# EAGLE board v001 (EAGLE 6.4)
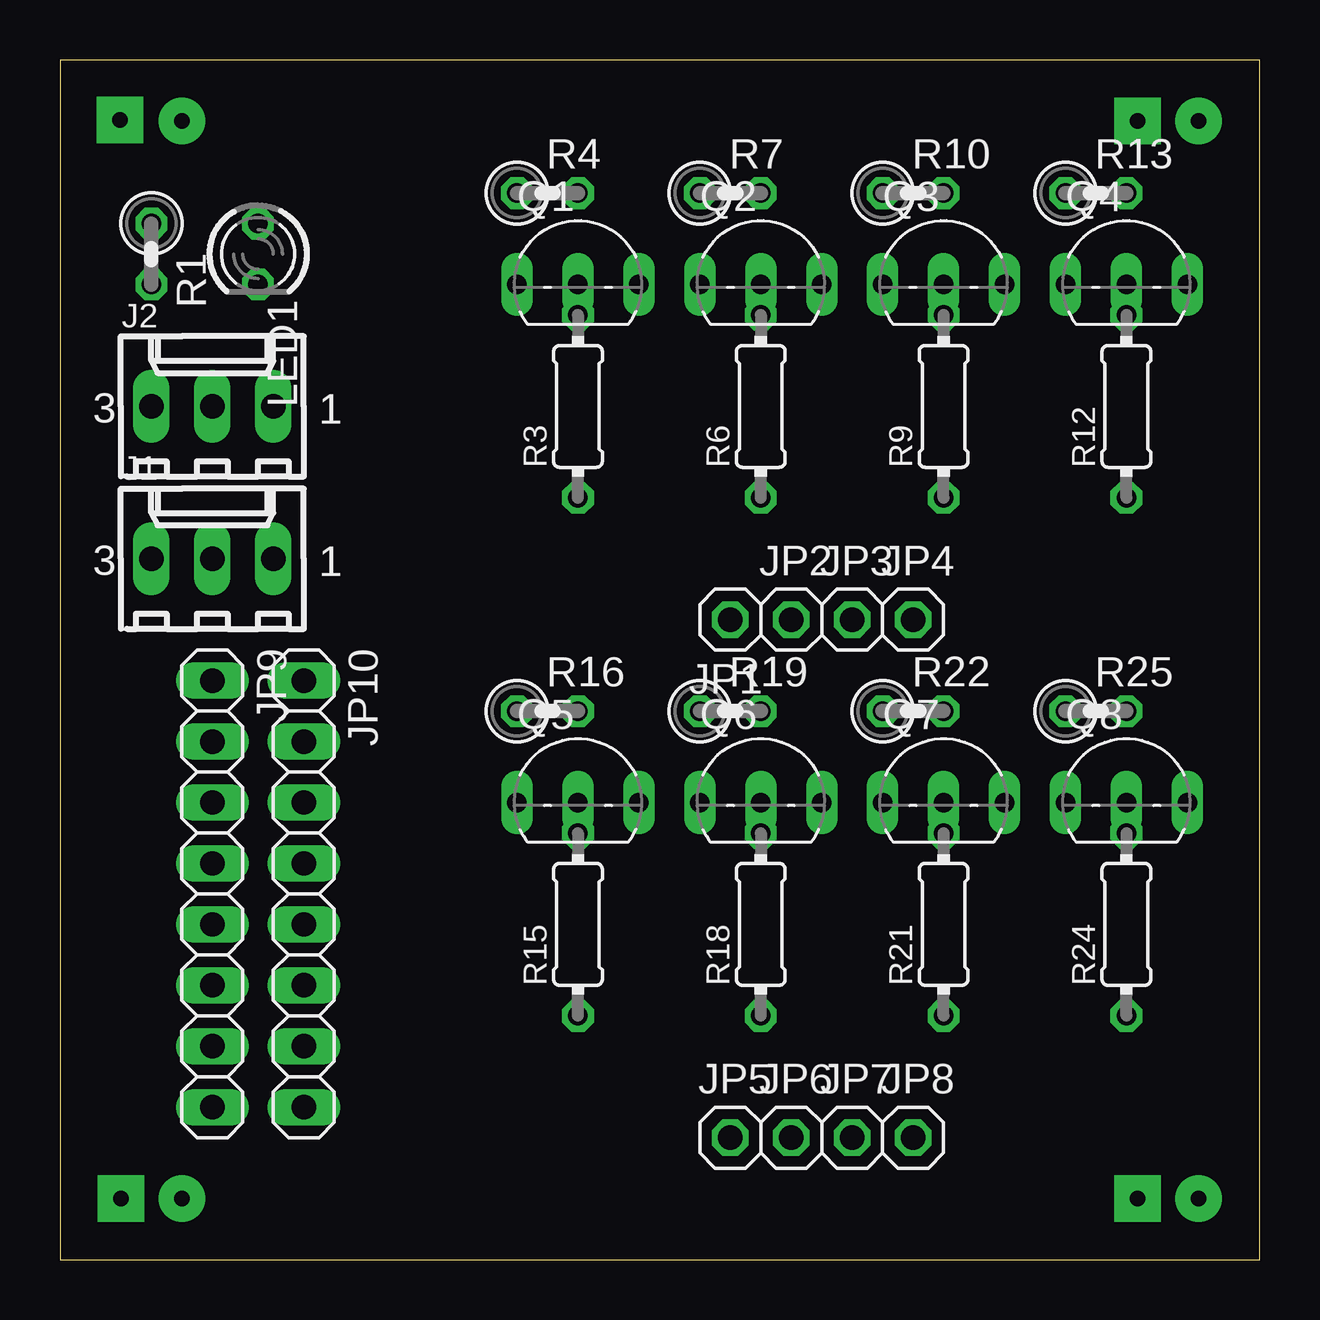
[diagram p0: board, top side]
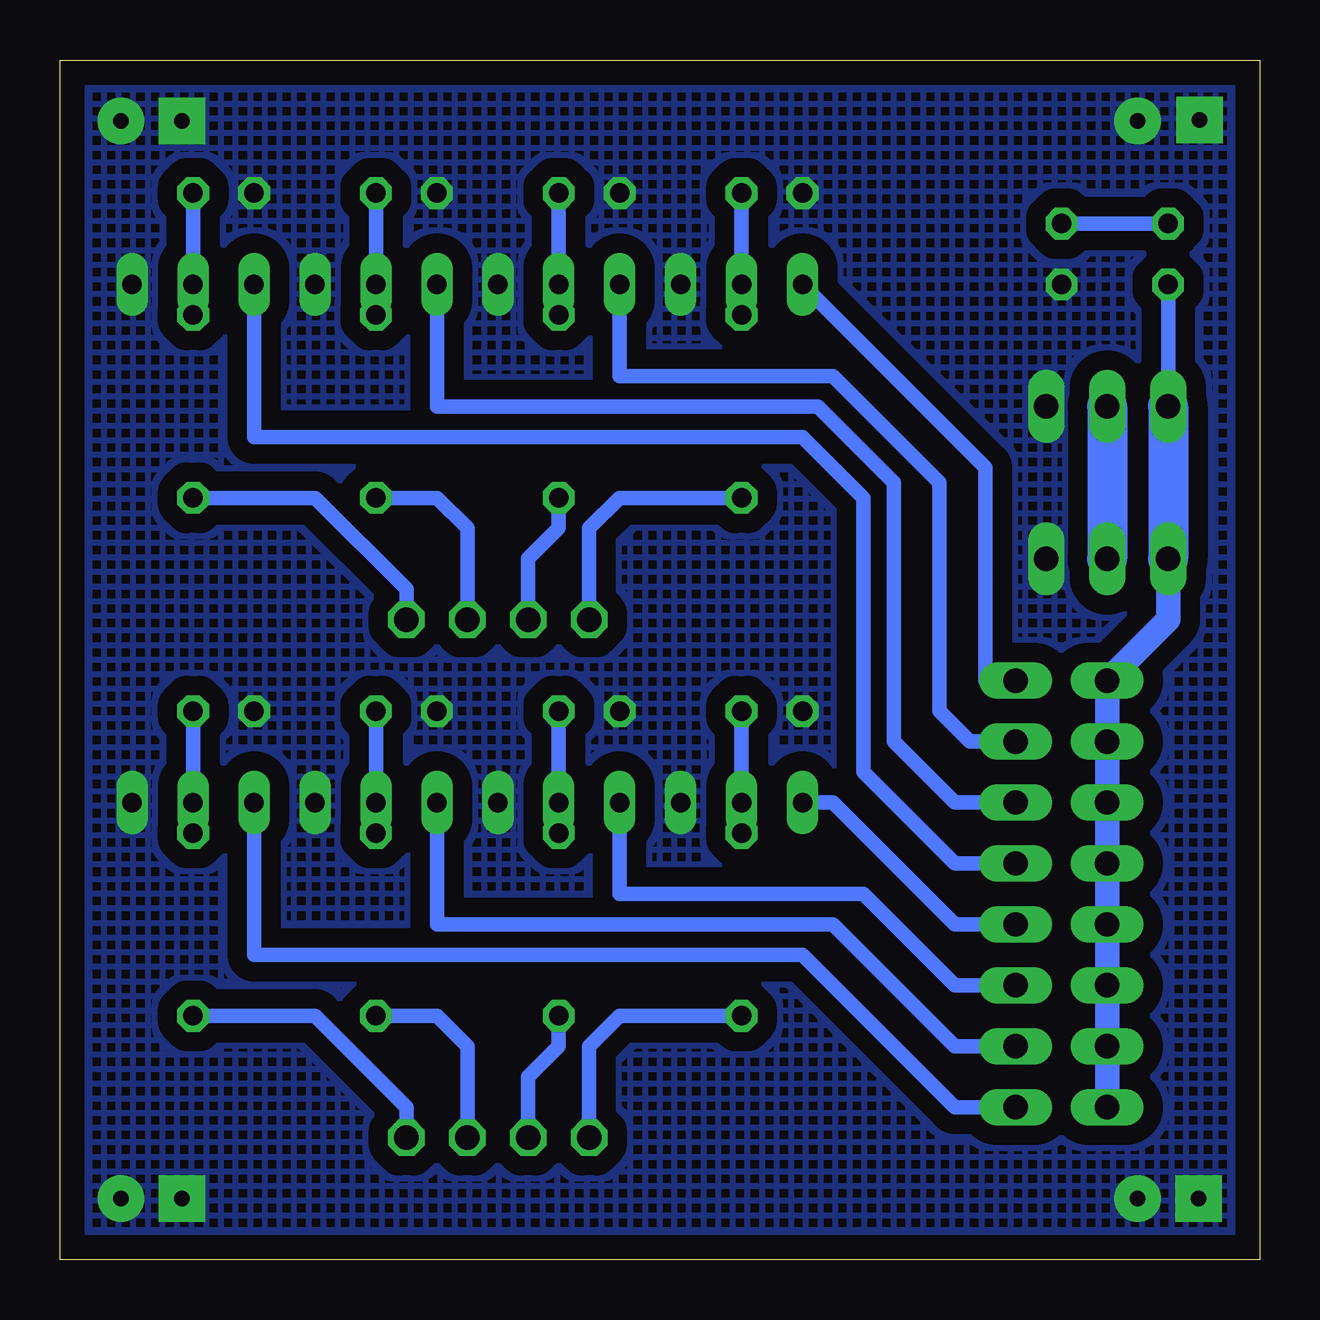
[diagram p1: board, bottom side, seen from below]

Size 50 x 50 mm. Coordinates in mm from the lower left corner, seen from the top.
Outline: 0,0 50,0 50,50 0,50 0,0
Copper layers (1*16): Top 0.035mm / dielectric 1.5mm / Bottom 0.035mm
Design rules "default": minimum track width 10mil, minimum drill 24mil, track to track 8mil, track to pad 8mil, pad to pad 8mil, via to via 8mil, smd to smd 8mil, copper to edge 40mil, drill to drill 8mil, minimum pad ring 10mil, minimum via ring 8mil, stop-mask expansion 4mil, vias tented up to drill 0mil, thermal gap 10mil

## Footprints (pad centres in the part's own frame; a part is rotated, then mirrored left to right if it is on the bottom)
6410-03 = drill 1.016 long: 1 2.54,0; 2 0,0; 3 -2.54,0
1X01 = drill 1.016 octagon: 1 0,0
1X08 = drill 1.016 long: 1 -8.89,0; 2 -6.35,0; 3 -3.81,0; 4 -1.27,0; 5 1.27,0; 6 3.81,0; 7 6.35,0; 8 8.89,0
LED3MM = drill 0.813 octagon: A -1.27,0; K 1.27,0
ZZZ_MODULE_05X05 = drill 0.64 pad 1.93 square: GND@1 2.5,47.5; GND@2 44.92,47.46; GND@7 2.54,2.54; GND@8 44.92,2.54 | drill 0.64 pad 1.93: GND@3 47.46,47.46; GND@4 5.08,47.46; GND@5 47.46,2.54; GND@6 5.08,2.54
TO92-EBC = drill 0.813 long: B 0,-1.27; C -2.54,-1.27; E 2.54,-1.27
0207/2V = drill 0.813 octagon: 1 -1.27,0; 2 1.27,0
0204/7 = drill 0.813 octagon: 1 -3.81,0; 2 3.81,0

## Placement (x,y rotation side)
J1  Pwr-1  [6410-03]  6.35,29.21 0 top
J2  Pwr-2  [6410-03]  6.35,35.56 0 top
JP1  In-1  [1X01]  27.94,26.67 180 top
JP2  In-2  [1X01]  30.48,26.67 0 top
JP3  In-3  [1X01]  33.02,26.67 0 top
JP4  In-4  [1X01]  35.56,26.67 0 top
JP5  In-5  [1X01]  27.94,5.08 0 top
JP6  In-6  [1X01]  30.48,5.08 0 top
JP7  In-7  [1X01]  33.02,5.08 0 top
JP8  In-8  [1X01]  35.56,5.08 0 top
JP9  12V  [1X08]  6.35,15.24 270 top
JP10  Outputs  [1X08]  10.16,15.24 270 top
LED1  Green  [LED3MM]  8.26,41.91 270 top
PCB1  ZZZ_MODULE05X05  [ZZZ_MODULE_05X05]  0,0 0 top
Q1  BC548  [TO92-EBC]  21.59,41.91 0 top
Q2  BC548  [TO92-EBC]  29.21,41.91 0 top
Q3  BC548  [TO92-EBC]  36.83,41.91 0 top
Q4  BC548  [TO92-EBC]  44.45,41.91 0 top
Q5  BC548  [TO92-EBC]  21.59,20.32 0 top
Q6  BC548  [TO92-EBC]  29.21,20.32 0 top
Q7  BC548  [TO92-EBC]  36.83,20.32 0 top
Q8  BC548  [TO92-EBC]  44.45,20.32 0 top
R1  1K  [0207/2V]  3.81,41.91 270 top
R3  2K2  [0204/7]  21.59,35.56 90 top
R4  10K  [0207/2V]  20.32,44.45 0 top
R6  2K2  [0204/7]  29.21,35.56 90 top
R7  10K  [0207/2V]  27.94,44.45 0 top
R9  2K2  [0204/7]  36.83,35.56 90 top
R10  10K  [0207/2V]  35.56,44.45 0 top
R12  2K2  [0204/7]  44.45,35.56 90 top
R13  10K  [0207/2V]  43.18,44.45 0 top
R15  2K2  [0204/7]  21.59,13.97 90 top
R16  10K  [0207/2V]  20.32,22.86 0 top
R18  2K2  [0204/7]  29.21,13.97 90 top
R19  10K  [0207/2V]  27.94,22.86 0 top
R21  2K2  [0204/7]  36.83,13.97 90 top
R22  10K  [0207/2V]  35.56,22.86 0 top
R24  2K2  [0204/7]  44.45,13.97 90 top
R25  10K  [0207/2V]  43.18,22.86 0 top

## Library data of the parts
J1 J2 = con-molex; OC_FARNELL: unknown; OC_NEWARK: unknown
JP1-JP10 = pinhead
LED1 = led
PCB1 = GNLib
Q1-Q8 = transistor-npn
R1 R4 R7 R10 R13 R16 R19 R22 R25 = resistor
R3 R6 R9 R12 R15 R18 R21 R24 = rcl

## Nets
+5V: J1.2 J2.2
+12V: J1.3 J2.3 JP9.1 JP9.2 JP9.3 JP9.4 JP9.5 JP9.6 JP9.7 JP9.8 R1.2
GND: J1.1 J2.1 LED1.K PCB1.GND@1 PCB1.GND@2 PCB1.GND@3 PCB1.GND@4 PCB1.GND@5 PCB1.GND@6 PCB1.GND@7 PCB1.GND@8 Q1.E Q2.E Q3.E Q4.E Q5.E Q6.E Q7.E Q8.E R4.1 R7.1 R10.1 R13.1 R16.1 R19.1 R22.1 R25.1
N$1: LED1.A R1.1
N$2: Q2.B R6.2 R7.2
N$3: JP2.1 R6.1
N$5: Q3.B R9.2 R10.2
N$6: JP3.1 R9.1
N$8: Q4.B R12.2 R13.2
N$9: JP4.1 R12.1
N$11: Q5.B R15.2 R16.2
N$12: JP5.1 R15.1
N$14: Q1.B R3.2 R4.2
N$15: JP1.1 R3.1
N$16: Q6.B R18.2 R19.2
N$17: JP6.1 R18.1
N$19: Q7.B R21.2 R22.2
N$20: JP7.1 R21.1
N$22: Q8.B R24.2 R25.2
N$23: JP8.1 R24.1
OUTPUT-1: JP10.1 Q1.C
OUTPUT-2: JP10.2 Q2.C
OUTPUT-3: JP10.3 Q3.C
OUTPUT-4: JP10.4 Q4.C
OUTPUT-5: JP10.5 Q5.C
OUTPUT-6: JP10.6 Q6.C
OUTPUT-7: JP10.7 Q7.C
OUTPUT-8: JP10.8 Q8.C

## Tracks (layer width: path | path; a pad name or v marks a point on that pad's centre or on a via)
+5V
  Bottom 1.676: J2.2 J1.2
+12V
  Bottom 0.61: R1.2 J2.3
  Bottom 1.016: J1.3 3.81,26.67 JP9.1 JP9.2 JP9.3 JP9.4 JP9.5 JP9.6 JP9.7 JP9.8
  Bottom 1.676: J2.3 J1.3
GND
  pour Bottom (isolate 0.813, no thermals, hatched): 50.16,50.16 0,50 0,0 50.16,0
N$1
  Bottom 0.61: LED1.A R1.1
N$2
  Bottom 0.61: R7.2 Q2.B R6.2
N$3
  Bottom 0.61: R6.1 29.21,30.48 30.48,29.21 JP2.1
N$5
  Bottom 0.61: R10.2 Q3.B R9.2
N$6
  Bottom 0.61: R9.1 34.29,31.75 33.02,30.48 JP3.1
N$8
  Bottom 0.61: R13.2 Q4.B R12.2
N$9
  Bottom 0.61: R12.1 39.37,31.75 35.56,27.94 JP4.1
N$11
  Bottom 0.61: R16.2 Q5.B R15.2
N$12
  Bottom 0.61: R15.1 26.67,10.16 27.94,8.89 JP5.1
N$14
  Bottom 0.61: R4.2 Q1.B R3.2
N$15
  Bottom 0.61: R3.1 26.67,31.75 27.94,30.48 JP1.1
N$16
  Bottom 0.61: R19.2 Q6.B R18.2
N$17
  Bottom 0.61: R18.1 29.21,8.89 30.48,7.62 JP6.1
N$19
  Bottom 0.61: R22.2 Q7.B R21.2
N$20
  Bottom 0.61: R21.1 34.29,10.16 33.02,8.89 JP7.1
N$22
  Bottom 0.61: R25.2 Q8.B R24.2
N$23
  Bottom 0.61: R24.1 39.37,10.16 35.56,6.35 JP8.1
OUTPUT-1
  Bottom 0.61: Q1.C 11.43,33.02 11.43,24.13 JP10.1
OUTPUT-2
  Bottom 0.61: JP10.2 12.06,21.59 13.34,22.86 13.34,32.38 17.78,36.83 26.67,36.83 Q2.C
OUTPUT-3
  Bottom 0.61: JP10.3 12.7,19.05 15.24,21.59 15.24,32.38 18.41,35.56 34.29,35.56 Q3.C
OUTPUT-4
  Bottom 0.61: Q4.C 41.91,34.29 19.05,34.29 16.51,31.75 16.51,20.32 12.7,16.51 JP10.4
OUTPUT-5
  Bottom 0.61: JP10.5 12.7,13.97 17.78,19.05 Q5.C
OUTPUT-6
  Bottom 0.61: JP10.6 12.7,11.43 16.51,15.24 26.67,15.24 Q6.C
OUTPUT-7
  Bottom 0.61: JP10.7 12.7,8.89 17.78,13.97 34.29,13.97 Q7.C
OUTPUT-8
  Bottom 0.61: JP10.8 12.7,6.35 19.05,12.7 41.91,12.7 Q8.C